# EAGLE board Panel-alt (EAGLE 9.2.2)
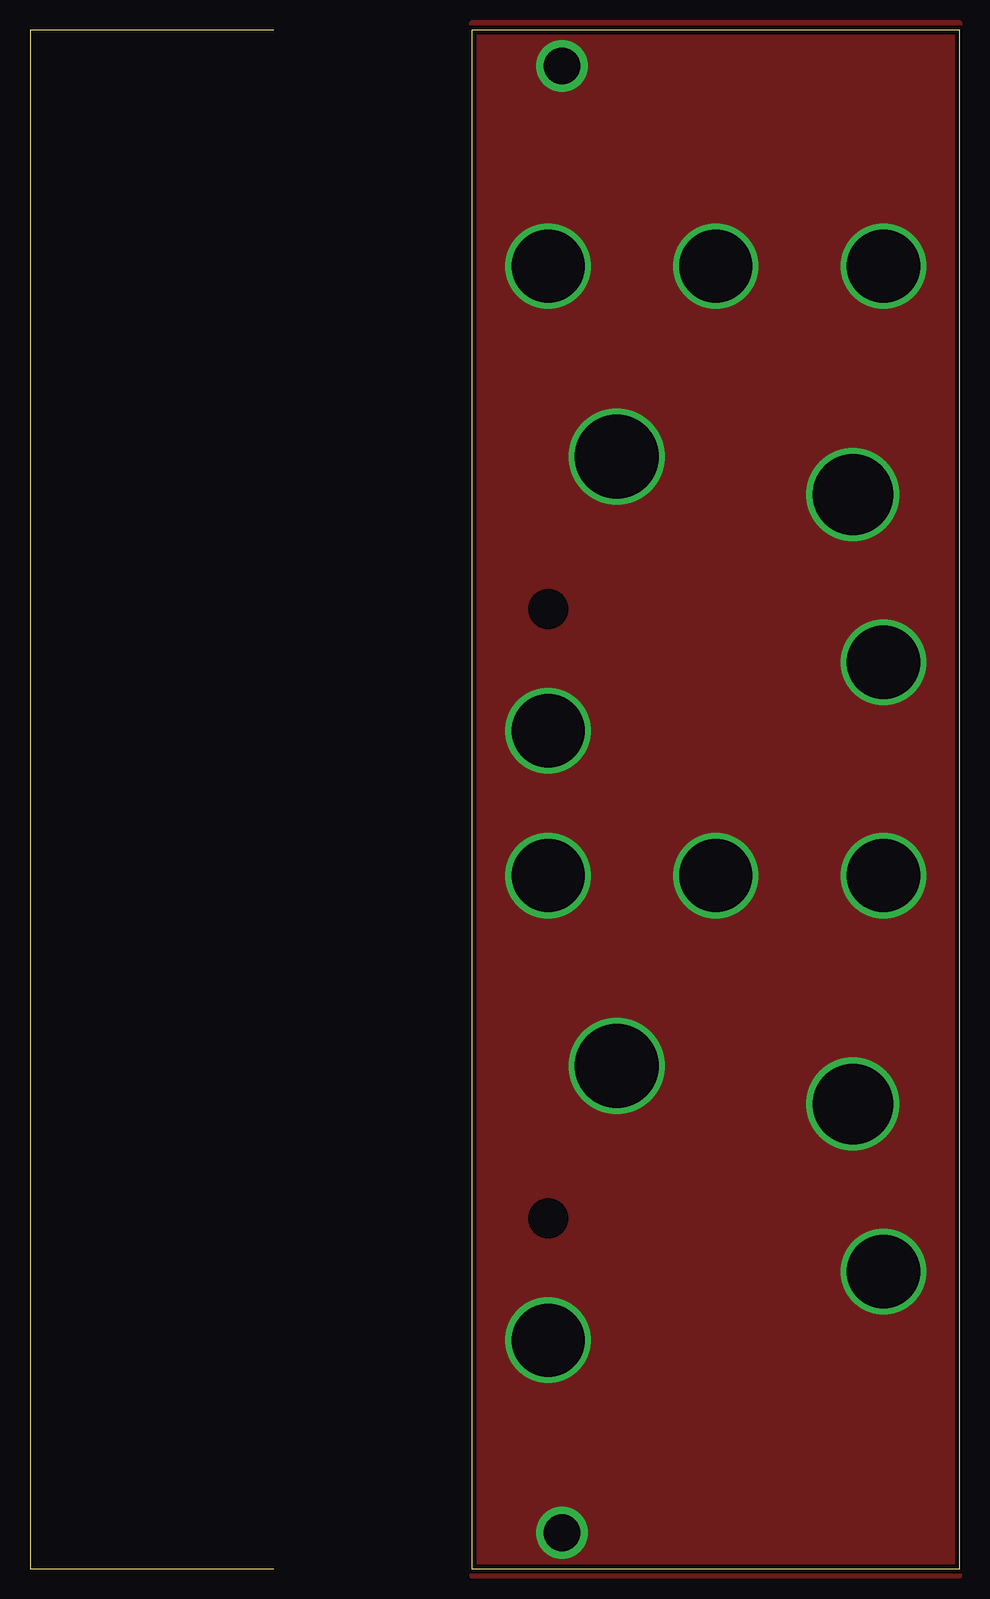
[diagram p0: board, top side]
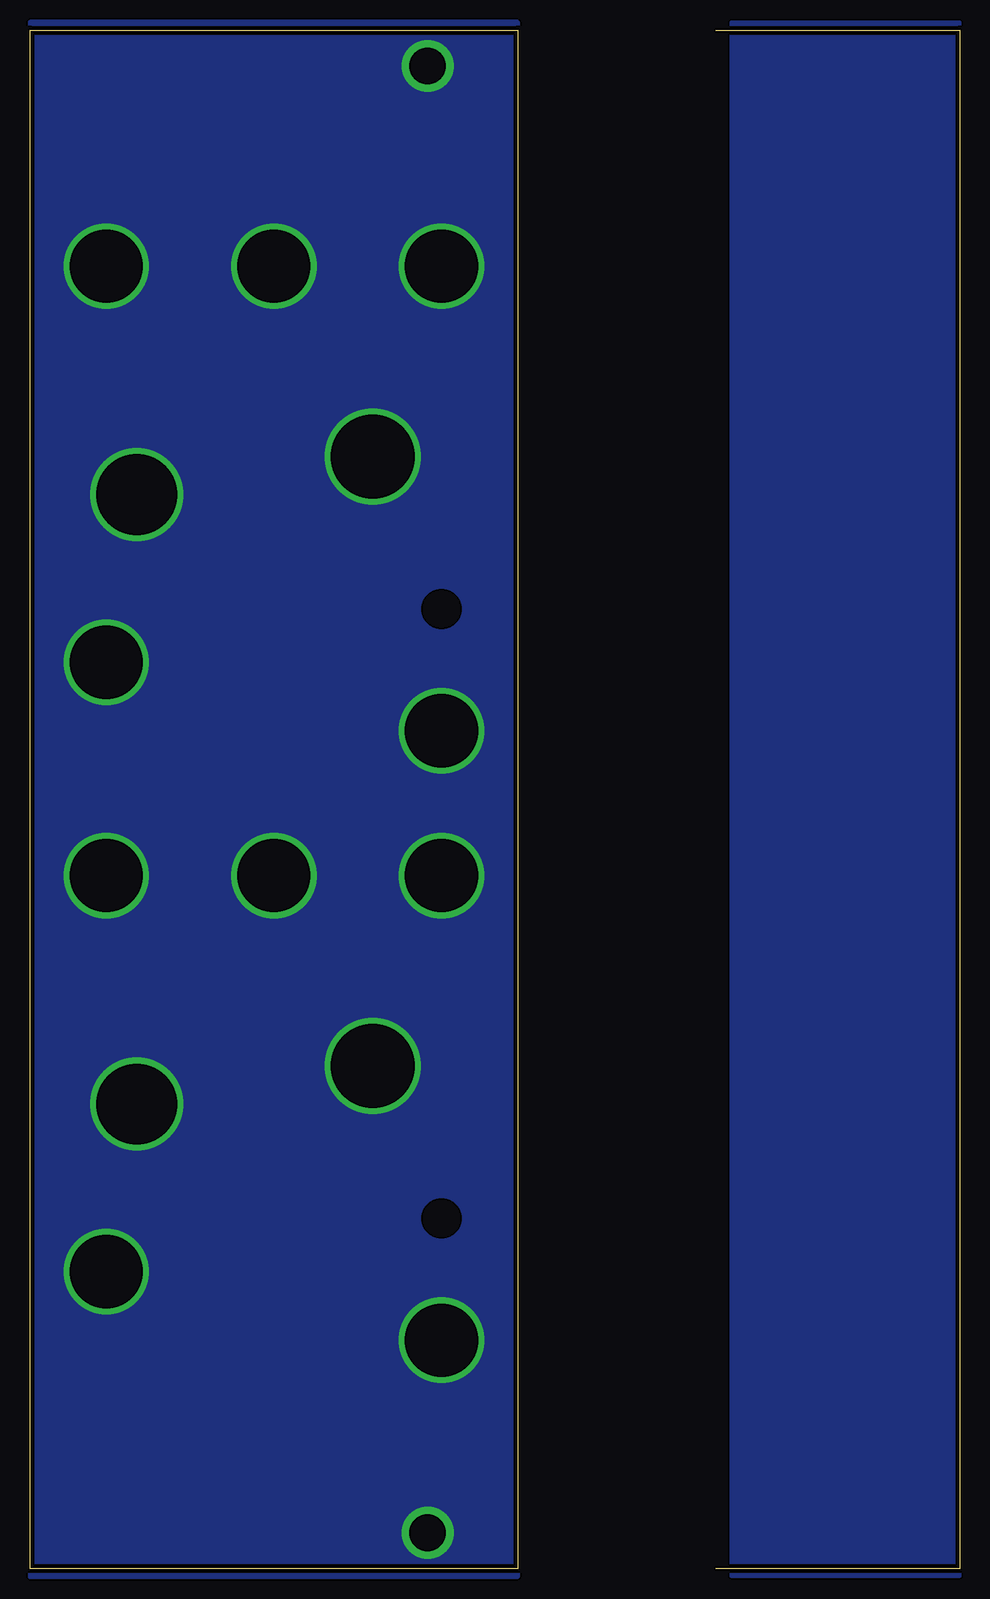
[diagram p1: board, bottom side, seen from below]

Size 77.47 x 128.27 mm. Coordinates in mm from the lower left corner, seen from the top.
Outline: 20.32,0 0,0 0,128.27 20.32,128.27
Outline: 36.83,0 77.47,0 77.47,128.27 36.83,128.27 36.83,0
Copper layers (1*16): Top 0.0356mm / dielectric 1.5011mm / Bottom 0.0356mm
Design rules "LaenPCBOrderNew": minimum track width 6mil, minimum drill 10mil, track to track 6mil, track to pad 6mil, pad to pad 6mil, via to via 6mil, smd to smd 6mil, copper to edge 15mil, drill to drill 2mil, minimum pad ring 5mil, minimum via ring 5mil, stop-mask expansion 3mil, vias tented up to drill 14mil, thermal gap 10mil
tRestrict: area 42.3,28.4 to 44,30; area 42.3,79.2 to 44,80.8
bRestrict: area 42.3,28.4 to 44,30; area 42.3,79.2 to 44,80.8

## Footprints (pad centres in the part's own frame; a part is rotated, then mirrored left to right if it is on the bottom)
MOUNTING-FIRST-PLATED = drill 3.048: P$2 3,7.5

## Placement (x,y rotation side)
U$1  MOUNTPLATED  [MOUNTING-FIRST-PLATED]  36.83,0 90 bottom
U$2  MOUNTPLATED  [MOUNTING-FIRST-PLATED]  36.83,128.27 270 top

## Library data of the parts
U$1 U$2 = barsstronics-mounting

## Nets
GND: U$1.P$2 U$2.P$2

## Tracks (layer width: path | path; a pad name or v marks a point on that pad's centre or on a via)
GND  (via drill 6.1, 6.73, 6.99)
  other vias: 43.18,108.58 57.15,108.58 71.12,108.58 43.18,69.85 57.15,57.79 71.12,57.79 43.18,19.05 71.12,24.76 71.12,75.56 48.89,92.71 68.58,89.53 43.18,57.79 68.58,38.73 48.89,41.91
  pour Top (no thermals): 36.83,128.91 77.47,128.91 77.47,-0.64 36.83,-0.64
  pour Bottom (no thermals): 36.83,128.91 77.47,128.91 77.47,-0.64 36.83,-0.64
GND1
  pour Bottom (no thermals): 0,128.91 19.05,128.91 19.05,-0.64 0,-0.64